# EAGLE board schematics (EAGLE 9.6.2)
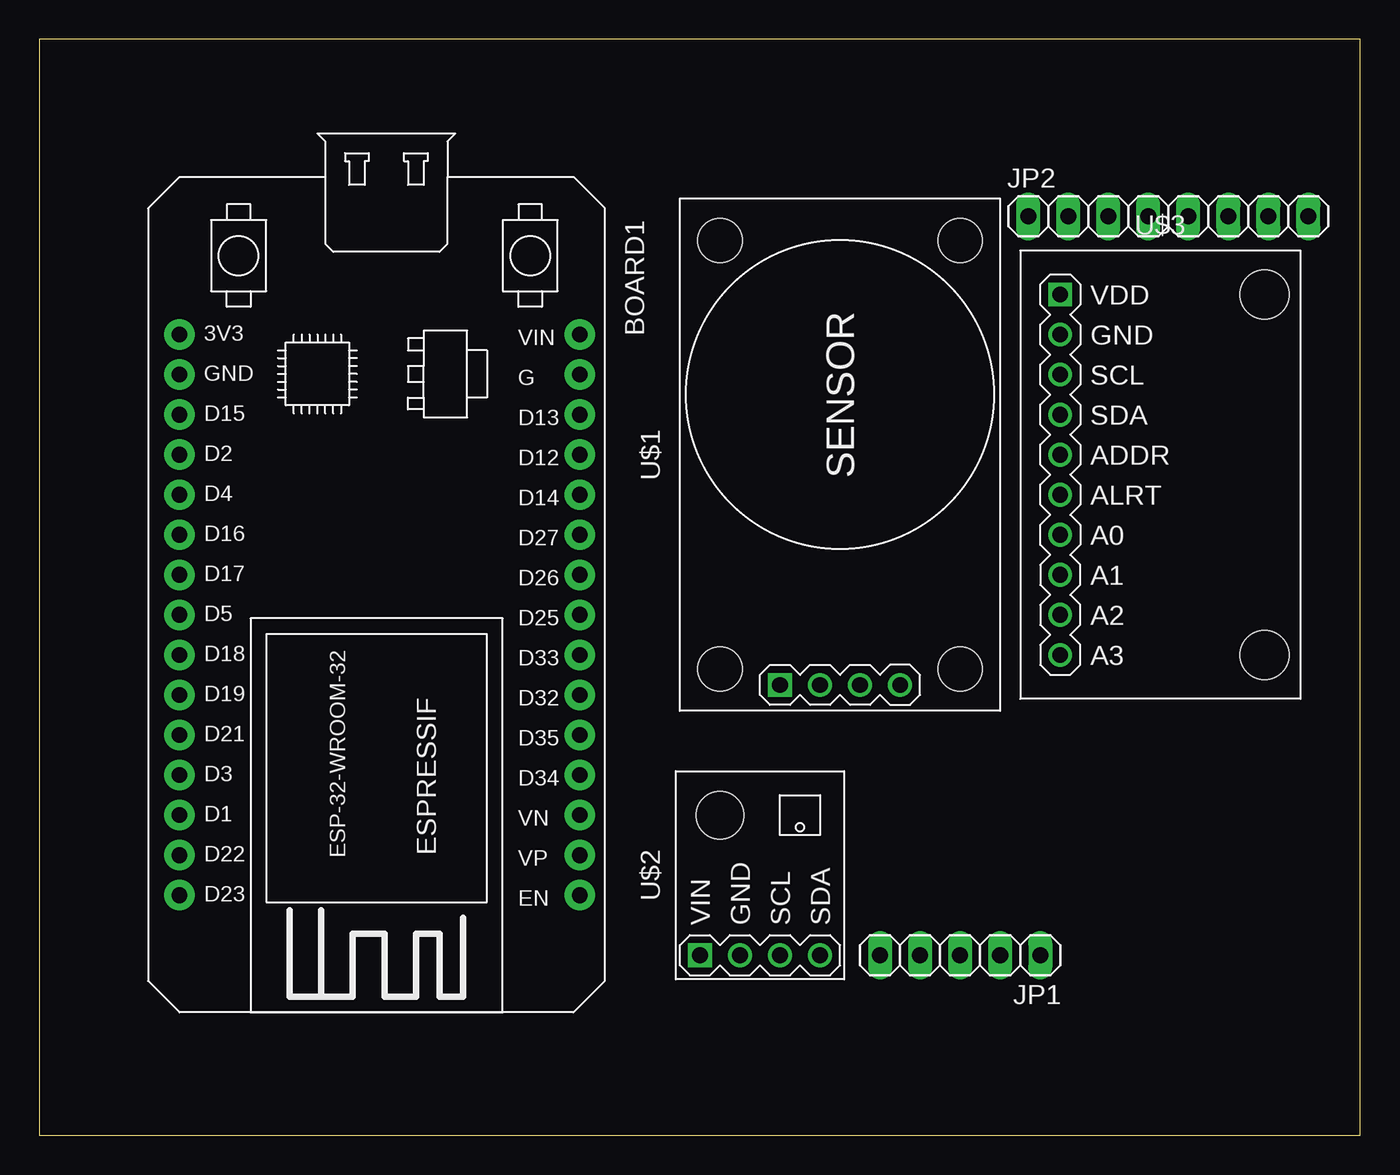
[diagram p0: board, top side]
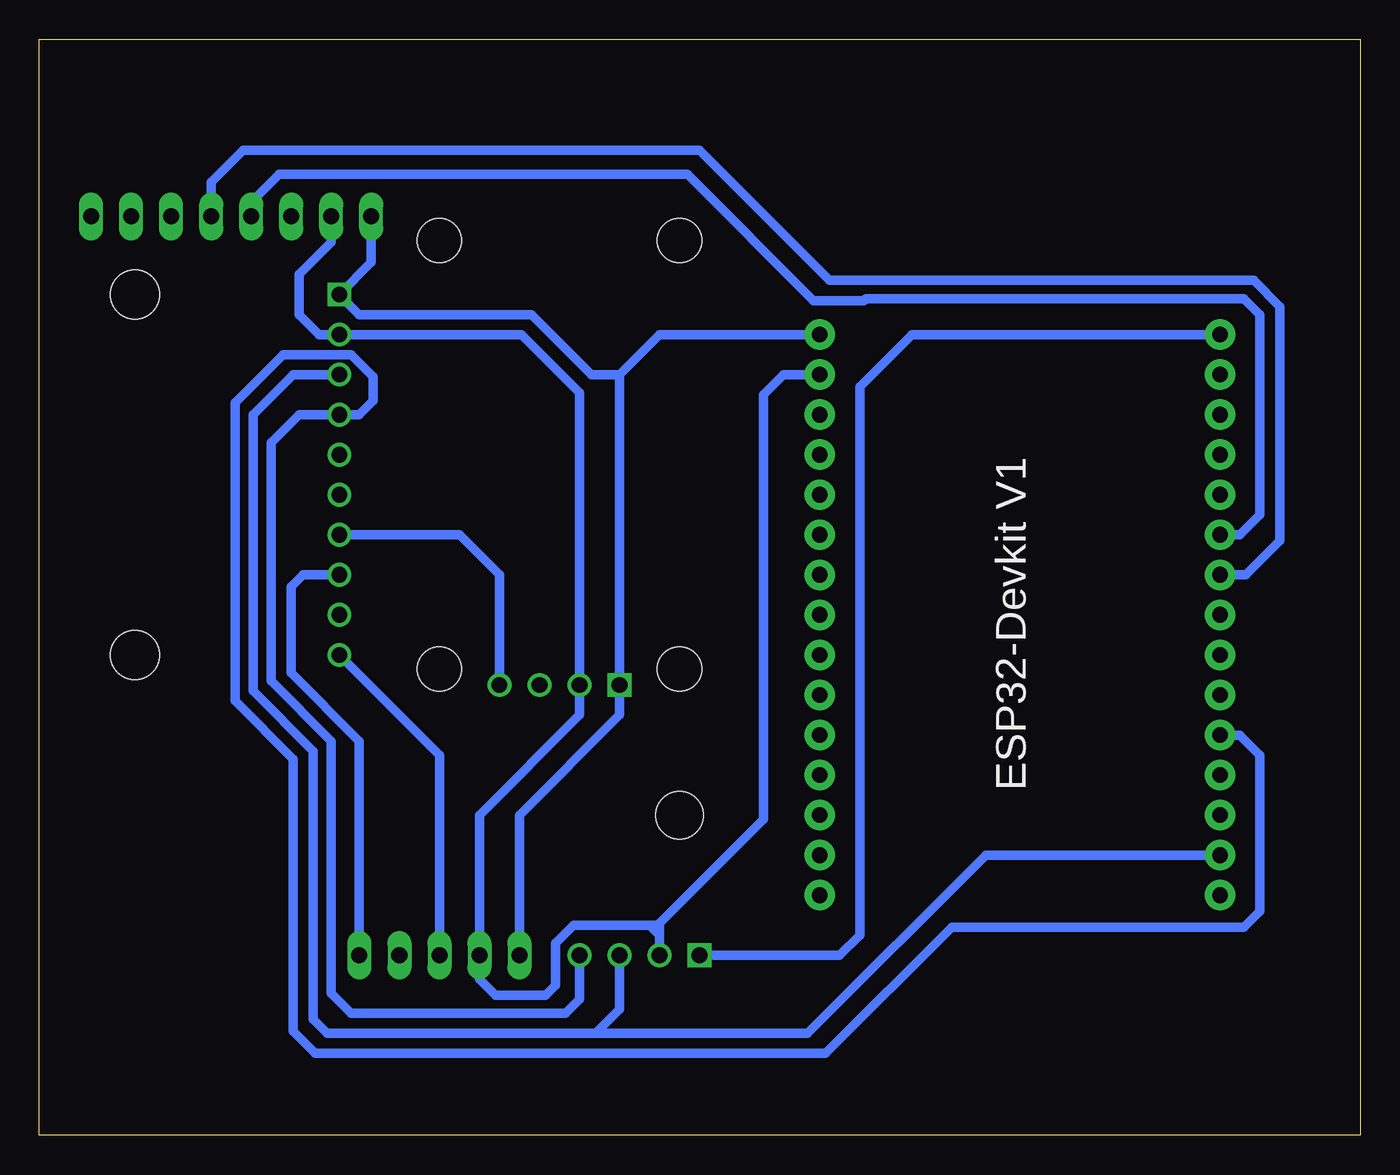
[diagram p1: board, bottom side, seen from below]

Size 83.8 x 69.52 mm. Coordinates in mm from the lower left corner, seen from the top.
Outline: 0,0 83.8,0 83.8,69.52 0,69.52 0,0
Copper layers (1*16): Top 0.035mm / dielectric 1.5mm / Bottom 0.035mm
Design rules "default": minimum track width 6mil, minimum drill 0.35mm, track to track 6mil, track to pad 6mil, pad to pad 6mil, via to via 6mil, smd to smd 6mil, copper to edge 40mil, drill to drill 6mil, minimum pad ring 10mil, minimum via ring 8mil, stop-mask expansion 4mil, vias tented up to drill 0mil, thermal gap 10mil

## Footprints (pad centres in the part's own frame; a part is rotated, then mirrored left to right if it is on the bottom)
ESP32-DEVKITV1 = drill 1 pad 1.93: 3V3 0,0; D1 30.48,0; D2 7.62,0; D3 27.94,0; D4 10.16,0; D5 17.78,0; D12 7.62,25.4; D13 5.08,25.4; D14 10.16,25.4; D15 5.08,0; D16 12.7,0; D17 15.24,0; D18 20.32,0; D19 22.86,0; D21 25.4,0; D22 33.02,0; D23 35.56,0; D25 17.78,25.4; D26 15.24,25.4; D27 12.7,25.4; D32 22.86,25.4; D33 20.32,25.4; D34 27.94,25.4; D35 25.4,25.4; EN 35.56,25.4; GND 2.54,25.4; GND@1 2.54,0; VIN 0,25.4; VN 30.48,25.4; VP 33.02,25.4
1X05 = drill 1.016 long: 1 -5.08,0; 2 -2.54,0; 3 0,0; 4 2.54,0; 5 5.08,0
1X08 = drill 1.016 long: 1 -8.89,0; 2 -6.35,0; 3 -3.81,0; 4 -1.27,0; 5 1.27,0; 6 3.81,0; 7 6.35,0; 8 8.89,0
GAS-SENSOR-MQ2 = drill 1 square: 1 -14.605,3.81 | drill 1: 2 -14.605,1.27; 3 -14.605,-1.27; 4 -14.605,-3.81 | hole 2.8: -13.589,7.62; -13.589,-7.62; 13.589,-7.62; 13.589,7.62
TEMP-HUM-PRES-BME280 = drill 1 square: 1 -5.08,3.81 | drill 1: 2 -5.08,1.27; 3 -5.08,-1.27; 4 -5.08,-3.81 | hole 3: 3.81,2.54
ADC-4CH-ADS1115 = drill 1 square: 1 -6.35,11.43 | drill 1: 2 -6.35,8.89; 3 -6.35,6.35; 4 -6.35,3.81; 5 -6.35,1.27; 6 -6.35,-1.27; 7 -6.35,-3.81; 8 -6.35,-6.35; 9 -6.35,-8.89; 10 -6.35,-11.43 | hole 3.1: 6.604,11.43; 6.604,-11.43

## Placement (x,y rotation side)
BOARD1  ESP32DEVKITV1SHRIDATTDUDHAT  [ESP32-DEVKITV1]  8.89,50.8 270 top
JP1  [1X05]  58.42,11.43 180 top
JP2  [1X08]  71.63,58.29 0 top
U$1  GAS-SENSOR-MQ2  [GAS-SENSOR-MQ2]  50.8,43.18 90 top
U$2  TEMP-HUM-PRES-BME280  [TEMP-HUM-PRES-BME280]  45.72,16.51 90 top
U$3  ADC-4CH-ADS1115  [ADC-4CH-ADS1115]  71.12,41.91 0 top

## Library data of the parts
BOARD1 = ESP32-DEVKITV1
JP1 JP2 = pinhead
U$1-U$3 = diy-modules

## Nets
3.3V: BOARD1.3V3 U$2.1
A3: JP1.3 U$3.10
AO: U$1.4 U$3.7
CO: JP1.1 U$3.8
GND: BOARD1.GND JP1.4 JP2.2 U$1.2 U$2.2 U$3.2
N$2: U$1.3
N$13: U$3.5
N$14: U$3.6
N$17: U$3.9
NH3': JP1.2
PIN3: JP2.3
PIN6: JP2.6
PIN7: JP2.7
PWM: JP2.8
RX: BOARD1.D16 JP2.4
SCL: BOARD1.D22 U$2.3 U$3.3
SDA: BOARD1.D21 U$2.4 U$3.4
TX: BOARD1.D17 JP2.5
VIN: BOARD1.VIN JP1.5 JP2.1 U$1.1 U$3.1

## Tracks (layer width: path | path; a pad name or v marks a point on that pad's centre or on a via)
3.3V
  Bottom 0.61: U$2.1 33.02,11.43 31.75,12.7 31.75,47.5 28.45,50.8 BOARD1.3V3
A3
  Bottom 0.61: U$3.10 58.42,24.13 JP1.3
AO
  Bottom 0.61: U$3.7 57.15,38.1 54.61,35.56 U$1.4
CO
  Bottom 0.61: U$3.8 67.06,35.56 67.82,34.8 67.82,29.34 63.5,25.02 JP1.1
GND  (via drill 0.35)
  Bottom 0.61: U$2.2 44.45,12.7 | 44.45,12.7 44.45,13.08 | 44.45,13.08 44.45,13.46 37.85,20.07 37.85,46.99 36.58,48.26 BOARD1.GND | 45.09,13.33 49.91,13.33 51.05,12.19 51.05,9.53 51.69,8.89 54.86,8.89 55.88,9.91 JP1.4 55.88,20.32 49.53,26.67 U$1.2 49.53,47.12 53.21,50.8 U$3.2 66.04,50.8 67.31,52.07 67.31,54.61 65.28,56.64 JP2.2 | 45.09,13.33 44.7,13.33 44.45,13.08 | 44.45,12.7 45.09,13.33
  other vias: 49.53,28.57
RX
  Bottom 0.61: BOARD1.D16 7.62,38.1 6.35,39.37 6.35,52.07 7.37,53.09 31.37,53.09 31.5,52.96 34.67,52.96 42.67,60.96 68.58,60.96 70.36,59.18 JP2.4
SCL
  Bottom 0.61: U$2.3 46.99,8 48.51,6.48 | U$3.3 67.69,48.26 70.23,45.72 70.23,28.19 66.42,24.38 66.42,7.37 65.53,6.48 49.02,6.48 48.51,6.48 | BOARD1.D22 23.75,17.78 35.05,6.48 48.51,6.48
SDA
  Bottom 0.61: U$2.4 49.53,8.64 50.42,7.75 64.01,7.75 65.28,9.02 65.28,25.02 69.09,28.83 69.09,43.94 67.31,45.72 U$3.4 63.5,45.72 62.61,46.61 62.61,48.13 64.01,49.53 68.33,49.53 71.37,46.48 71.37,27.56 67.69,23.88 67.69,6.6 66.29,5.21 33.91,5.21 25.91,13.21 7.37,13.21 6.35,14.22 6.35,24.13 7.62,25.4 BOARD1.D21
TX
  Bottom 0.61: BOARD1.D17 7.24,35.56 5.08,37.72 5.08,52.58 6.73,54.23 33.66,54.23 41.91,62.48 70.87,62.48 72.9,60.45 JP2.5
VIN
  Bottom 0.61: 46.99,48.26 44.45,50.8 BOARD1.VIN | 46.99,48.26 U$1.1 46.99,26.67 53.34,20.32 JP1.5 | 46.99,48.26 48.77,48.26 52.58,52.07 63.5,52.07 U$3.1 62.74,55.37 JP2.1